# Allegro board backup.brd
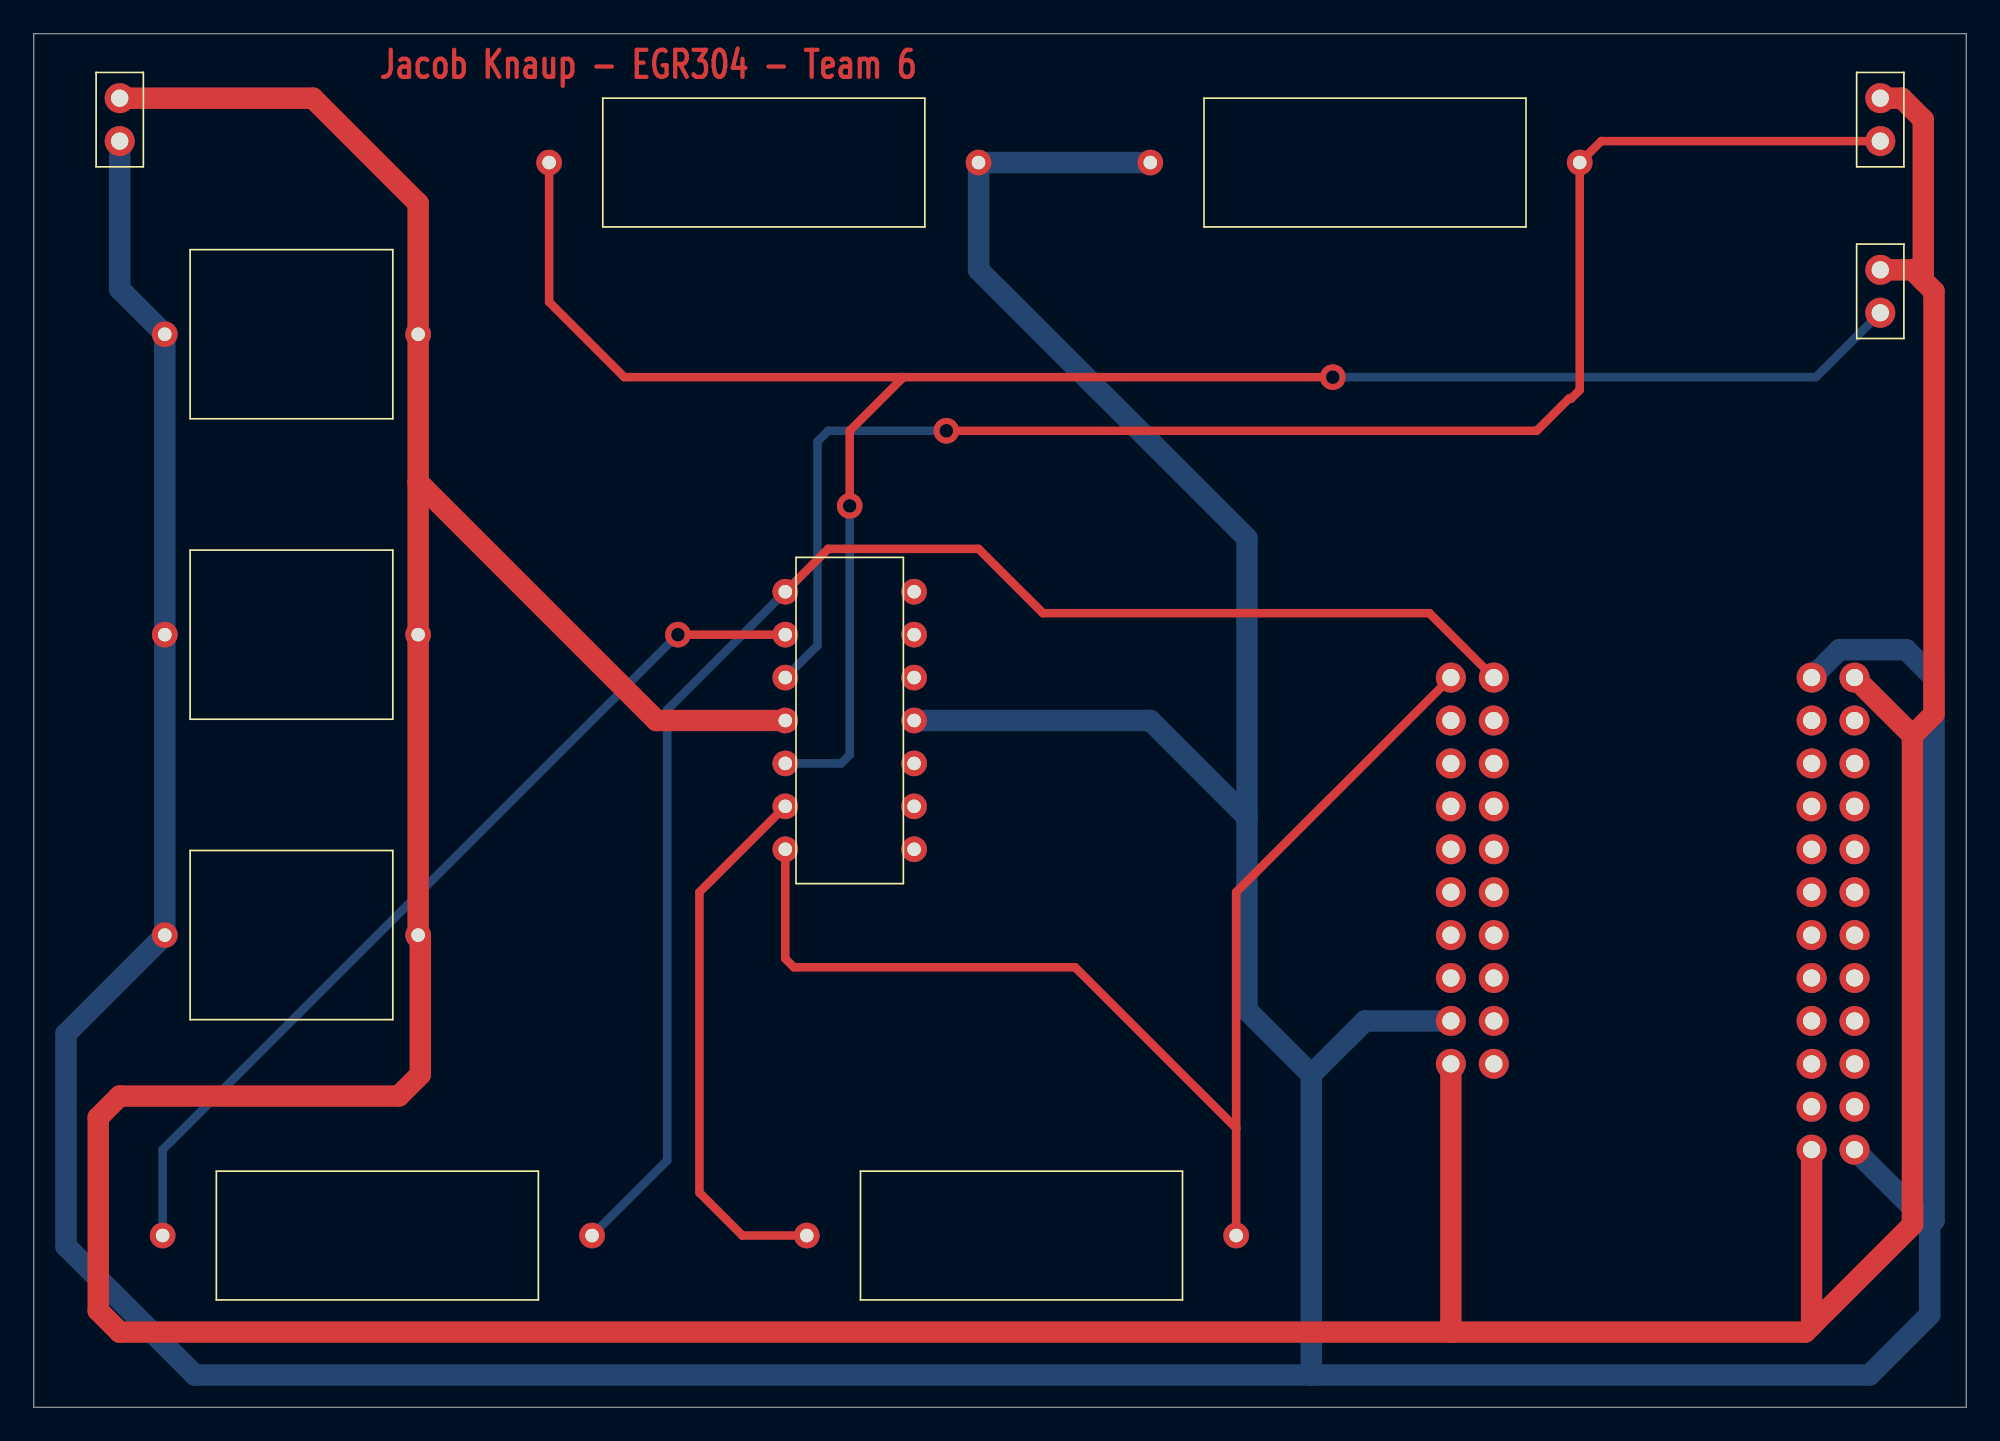
[diagram p0: board, top side]
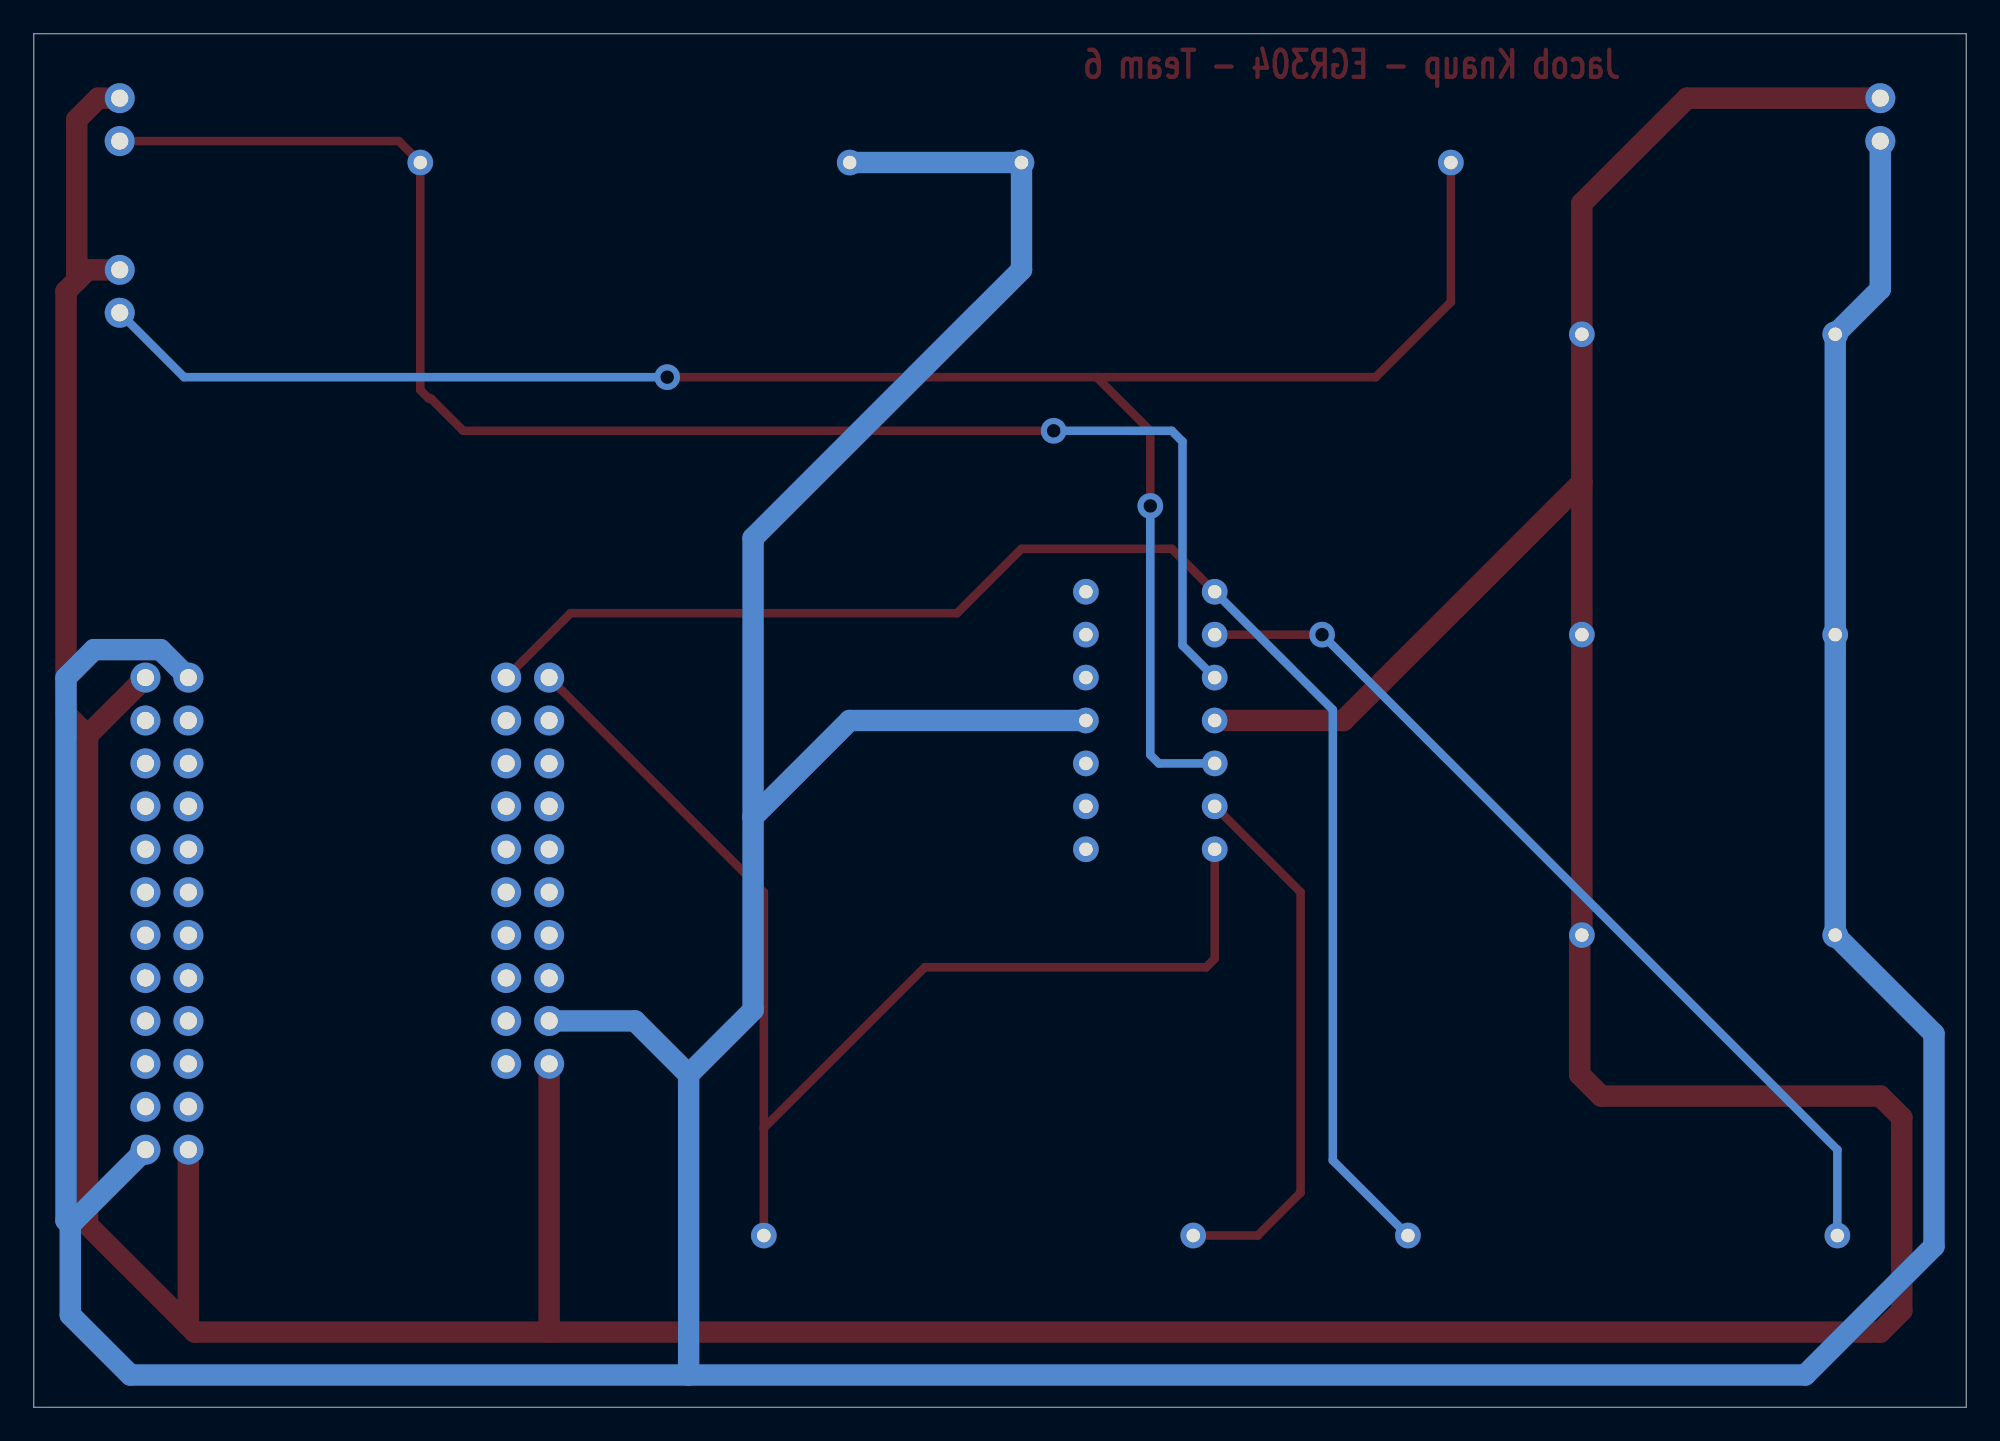
[diagram p1: board, bottom side, seen from below]

Outline 114.3 x 81.28 mm; copper layers: TOP, BOTTOM. Coordinates in mm from the lower left corner of the outline.
Outline path: 0,81.28 0,0 114.3,0 114.3,81.28 0,81.28

## Placement (name value [footprint] x y rotation side)
C1  0.1uF  [CAPACITOR]  15.24 63.5 180 top
C2  0.1uF  [CAPACITOR]  15.24 45.72 0 top
C3  0.1uF  [CAPACITOR]  15.24 27.94 180 top
J1  CON2  [2PINHEADER]  5.08 76.2 0 top
R1  500  [RESISTOR]  20.32 10.16 0 top
R2  500  [RESISTOR]  58.42 10.16 0 top
R3  1k  [RESISTOR]  78.74 73.66 180 top
R4  1k  [RESISTOR]  43.18 73.66 0 top
U1  FlexSensor  [2PINHEADER]  109.22 76.2 0 top
U2  FlexSensor  [2PINHEADER]  109.22 66.04 0 top
U3  LM324  [LM324AN]  48.26 40.64 0 top
U4  PSoC 4 BLE  [PSOC4BLEV2]  83.82 17.78 0 top

## Library data of the parts
C1-C3 = CAP NP
J1 = CON2
R1 R2 = R
R3 R4 = RESISTOR
U1 U2 = FlexSensor_5
U3 = LM324
U4 = PSoC 4 BLE

## Footprints (pads in the part's own frame, mm; a bottom-side part is the same pattern mirrored in y, then rotated)
2PINHEADER
  round 1.778 hole 1.016: 1(0,1.27) 2(0,-1.27)
CAPACITOR
  round 1.524 hole 0.8: 1(-7.493,0) 2(7.493,0)
LM324AN
  round 1.524 hole 0.8: 1(-3.81,7.62) 2(-3.81,5.08) 3(-3.81,2.54) 4(-3.81,0) 5(-3.81,-2.54) 6(-3.81,-5.08) 7(-3.81,-7.62) 8(3.81,-7.62) 9(3.81,-5.08) 10(3.81,-2.54) 11(3.81,0) 12(3.81,2.54) 13(3.81,5.08) 14(3.81,7.62)
PSOC4BLEV2
  round 1.778 hole 1.016: 1(2.54,2.54) 2(0,2.54) 3(2.54,5.08) 4(0,5.08) 5(2.54,7.62) 6(0,7.62) 7(2.54,10.16) 8(0,10.16) 9(2.54,12.7) 10(0,12.7) 11(2.54,15.24) 12(0,15.24) 13(2.54,17.78) 14(0,17.78) 15(2.54,20.32) 16(0,20.32) 17(2.54,22.86) 18(0,22.86) 19(2.54,25.4) 20(0,25.4) 21(21.336,25.4) 22(23.876,25.4) 23(21.336,22.86) 24(23.876,22.86) 25(21.336,20.32) 26(23.876,20.32) 27(21.336,17.78) 28(23.876,17.78) 29(21.336,15.24) 30(23.876,15.24) 31(21.336,12.7) 32(23.876,12.7) 33(21.336,10.16) 34(23.876,10.16) 35(21.336,7.62) 36(23.876,7.62) 37(21.336,5.08) 38(23.876,5.08) 39(21.336,2.54) 40(23.876,2.54) 41(21.336,0) 42(23.876,0) 43(21.336,-2.54) 44(23.876,-2.54)
RESISTOR
  round 1.524 hole 0.8: 1(-12.7,0) 2(12.7,0)

## Nets
+5V: C1.1 C2.2 C3.1 J1.1 U1.1(VIN) U2.1(VIN) U3.4(V+) U4.2(VDD) U4.22(VDDA) U4.43(VDDR)
GND: C1.2 C2.1 C3.2 J1.2 R3.2 R4.2 U3.11(V-) U4.4(GND1) U4.21(GND2) U4.44(GND3)
A0: R1.2 U3.1(OUT) U4.19(P0.0)
A1: R2.2 U3.7(OUT) U4.20(P0.1)
N04951: R3.1 U1.2(VOUT) U3.3(IN+)
N04995: R4.1 U2.2(VOUT) U3.5(IN+)
N06521: R1.1 U3.2(IN-)
N09660: R2.1 U3.6(IN-)

Pads without a net: U3 8 9 10 12 13 14; U4 1 3 5 6 7 8 9 10 11 12 13 14 15 16 17 18 23 24 25 26 27 28 29 30 31 32 33 34 35 36 37 38 39 40 41 42

## Via types
v1: diameter 1.524, hole 0.8, TOP to BOTTOM, 4 vias

## Routing (per net, layer and track width the routed paths; a pad name or vN(x,y) marks a point on that pad's centre or on a via; arc(x,y) is an arc through that point)
+5V: length 344.6
  TOP w1.27: 22.73,54.74 36.83,40.64 U3.4 ; 22.73,54.74 22.73,71.25 16.51,77.47 J1.1 ; 22.73,54.74 22.73,27.94 22.86,27.81 22.86,19.69 21.59,18.41 5.08,18.41 3.81,17.14 3.81,5.71 5.08,4.45 83.82,4.45 ; U2.1 111.12,67.31 111.76,66.67 ; 105.16,4.83 111.12,10.79 111.12,39.75 ; 105.16,4.83 U4.43 ; 105.16,4.83 104.77,4.45 83.82,4.45 ; 111.12,39.75 U4.22 ; 111.12,39.75 112.39,41.02 112.39,66.04 111.76,66.67 ; 83.82,4.45 U4.2 ; U1.1 110.49,77.47 111.76,76.2 111.76,66.67
GND: length 358.2
  BOTTOM w1.27: 75.56,1.9 9.52,1.9 1.91,9.52 1.91,22.1 C3.2 C2.1 C1.2 5.08,66.17 J1.2 ; 75.56,1.9 75.56,19.69 ; 75.56,1.9 108.58,1.9 112.14,5.46 112.14,10.79 ; 71.75,34.92 71.75,23.49 75.56,19.69 ; 71.75,34.92 66.04,40.64 U3.11 ; 71.75,34.92 71.75,51.44 55.88,67.31 R4.2 R3.2 ; 112.14,10.79 112.39,11.05 112.39,43.18 110.74,44.83 106.81,44.83 U4.21 ; 112.14,10.79 U4.44 ; 75.56,19.69 78.74,22.86 U4.4
A0: length 89
  TOP w0.508: U3.1 46.99,50.8 55.88,50.8 59.69,46.99 82.55,46.99 U4.19
  BOTTOM w0.508: U3.1 37.47,41.27 37.47,14.6 R1.2
A1: length 75.6
  TOP w0.508: R2.2 71.12,16.51 ; 71.12,16.51 71.12,30.48 U4.20 ; 71.12,16.51 61.6,26.03 44.96,26.03 44.45,26.54 U3.7
N04951: length 92.9
  TOP w0.508: v1(53.98,57.78) 88.9,57.78 90.8,59.69 90.93,59.69 91.44,60.2 R3.1 92.71,74.93 U1.2
  BOTTOM w0.508: v1(53.98,57.78) 46.99,57.78 46.36,57.15 46.36,45.09 U3.3
N04995: length 118.1
  TOP w0.508: v1(76.83,60.96) 51.44,60.96 ; 51.44,60.96 48.26,57.78 v1(48.26,53.34) ; 51.44,60.96 34.93,60.96 30.48,65.41 R4.1
  BOTTOM w0.508: v1(76.83,60.96) 105.41,60.96 U2.2 ; v1(48.26,53.34) 48.26,38.61 47.75,38.1 U3.5
N06521: length 54.5
  TOP w0.508: v1(38.1,45.72) U3.2
  BOTTOM w0.508: R1.1 7.62,15.24 v1(38.1,45.72)
N09660: length 32.4
  TOP w0.508: R2.1 41.91,10.16 39.37,12.7 39.37,30.48 U3.6

## Text on the board
TOP: Jacob Knaup - EGR304 - Team 6
